# EAGLE board driverMotor (EAGLE 9.6.2)
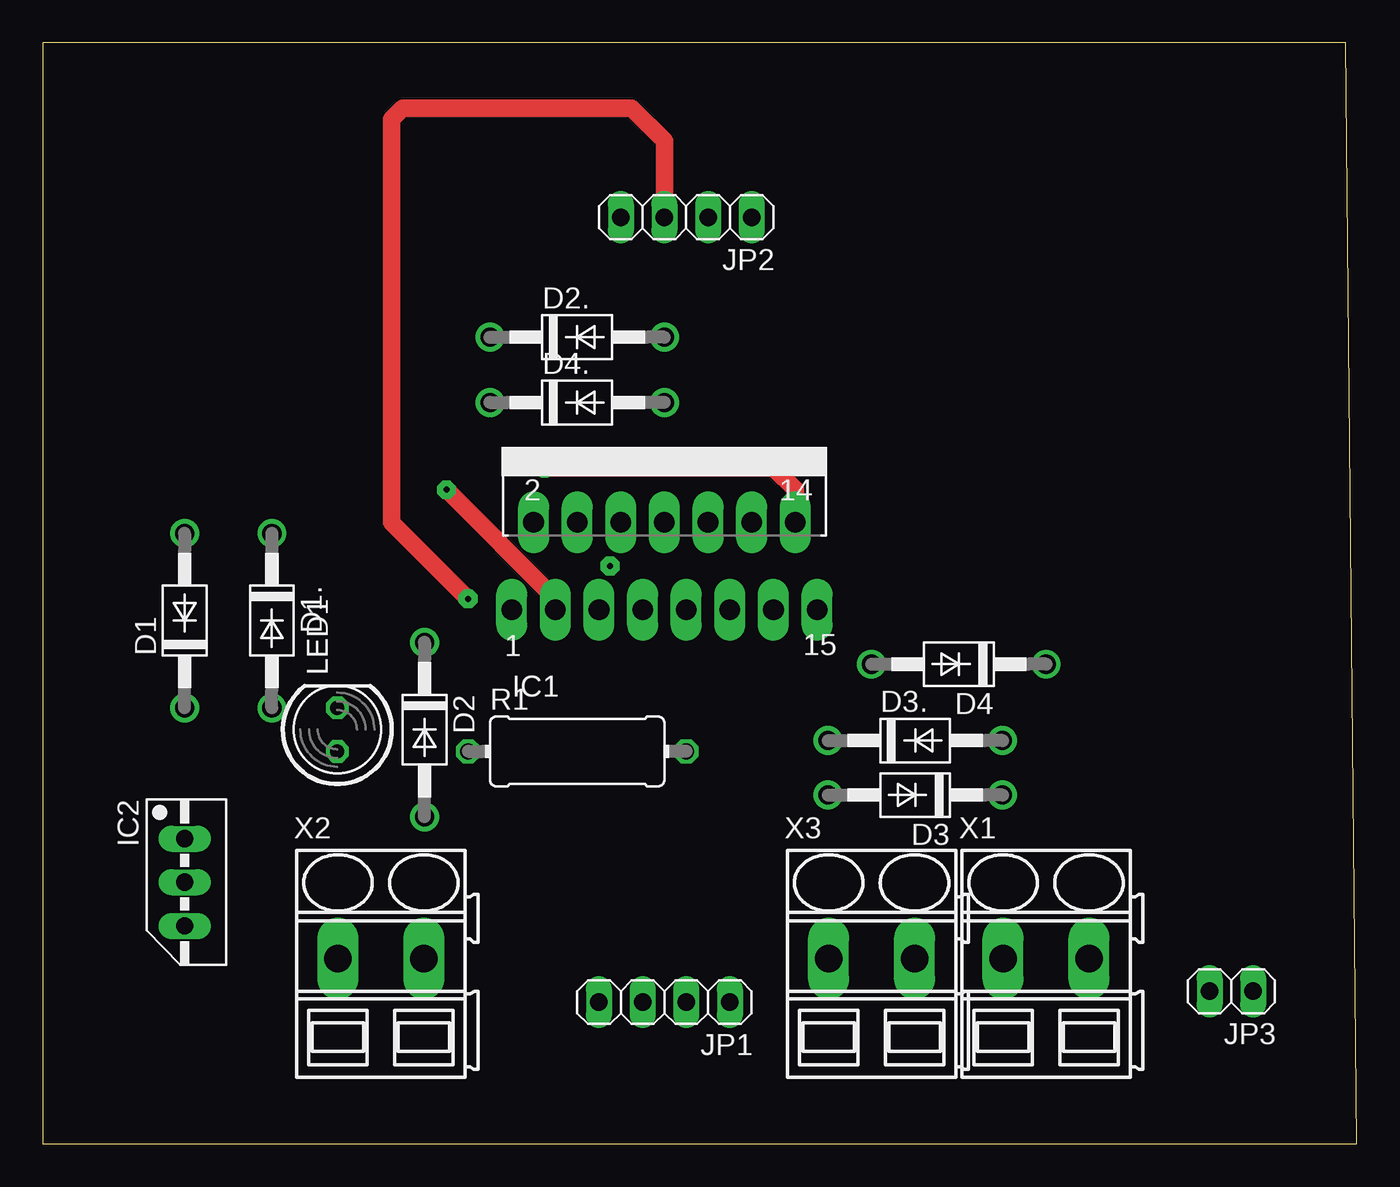
[diagram p0: board, top side]
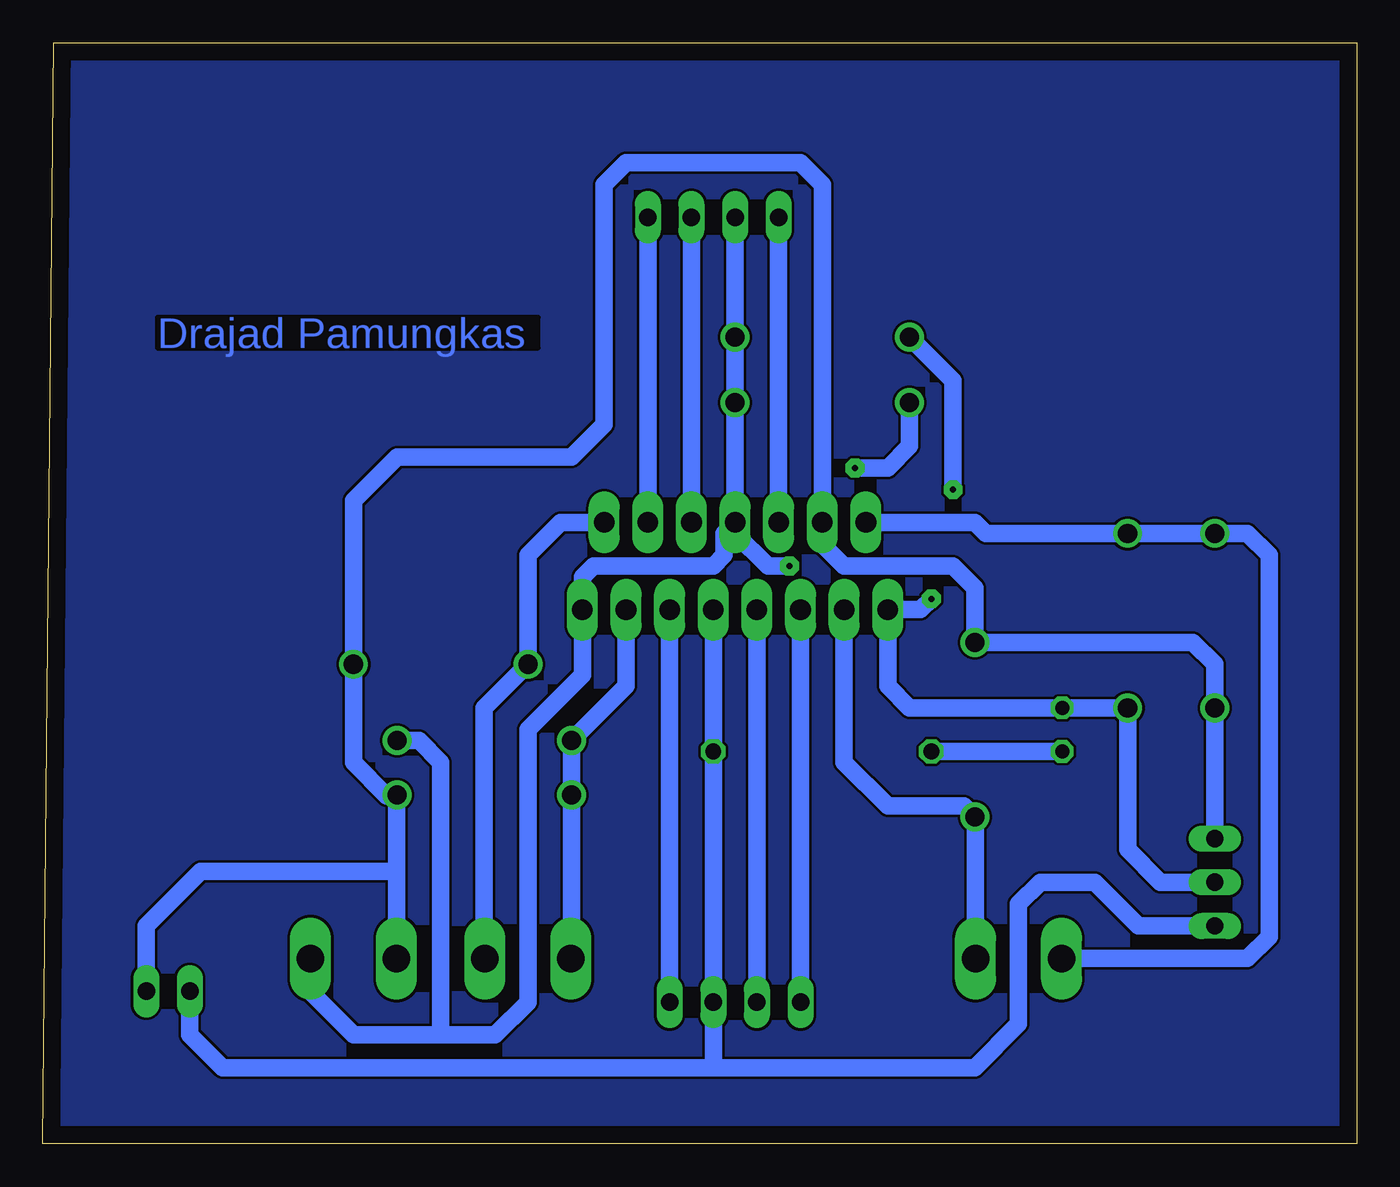
[diagram p1: board, bottom side, seen from below]

Size 76.5 x 64.12 mm. Coordinates in mm from the lower left corner, seen from the top.
Outline: 0,0 76.5,0 75.87,64.12 0,64.12 0,0
Copper layers (1*16): Top 0.035mm / dielectric 1.5mm / Bottom 0.035mm
Design rules "default": minimum track width 6mil, minimum drill 0.35mm, track to track 6mil, track to pad 6mil, pad to pad 6mil, via to via 6mil, smd to smd 6mil, copper to edge 40mil, drill to drill 6mil, minimum pad ring 10mil, minimum via ring 8mil, stop-mask expansion 4mil, vias tented up to drill 0mil, thermal gap 10mil

## Footprints (pad centres in the part's own frame; a part is rotated, then mirrored left to right if it is on the bottom)
DO41-10 = drill 1.118: A 5.08,0; C -5.08,0
MULTIWATT-15 = drill 1.2 long: 1 -8.89,-7.62; 2 -7.62,-2.54; 3 -6.35,-7.62; 4 -5.08,-2.54; 5 -3.81,-7.62; 6 -2.54,-2.54; 7 -1.27,-7.62; 8 0,-2.54; 9 1.27,-7.62; 10 2.54,-2.54; 11 3.81,-7.62; 12 5.08,-2.54; 13 6.35,-7.62; 14 7.62,-2.54; 15 8.89,-7.62
78MXXS = drill 1.016 long: GND 0,-2.54; IN -2.54,-2.54; OUT 2.54,-2.54
1X04 = drill 1.016 long: 1 -3.81,0; 2 -1.27,0; 3 1.27,0; 4 3.81,0
1X02 = drill 1.016 long: 1 -1.27,0; 2 1.27,0
LED5MM = drill 0.813 octagon: A -1.27,0; K 1.27,0
0411/12 = drill 0.914 octagon: 1 -6.35,0; 2 6.35,0
SMKDSP_1,5/2 = drill 1.6 pad 1.8 long: 1 -2.5,0; 2 2.5,0

## Placement (x,y rotation side)
D1  1N4004  [DO41-10]  8.25,30.48 90 top
D1.  1N4004  [DO41-10]  13.34,30.48 270 top
D2  1N4004  [DO41-10]  22.23,24.13 270 top
D2.  1N4004  [DO41-10]  31.12,46.99 0 top
D3  1N4004  [DO41-10]  50.8,20.32 180 top
D3.  1N4004  [DO41-10]  50.8,23.5 0 top
D4  1N4004  [DO41-10]  53.34,27.94 180 top
D4.  1N4004  [DO41-10]  31.12,43.18 0 top
IC1  L298  [MULTIWATT-15]  36.2,38.73 0 top
IC2  [78MXXS]  10.8,15.24 270 top
JP1  [1X04]  36.2,8.25 180 top
JP2  [1X04]  37.47,53.97 180 top
JP3  [1X02]  69.22,8.89 180 top
LED1  [LED5MM]  17.14,24.13 90 top
R1  [0411/12]  31.12,22.86 0 top
X1  SMKDSP_1,5/2  [SMKDSP_1,5/2]  58.42,10.79 0 top
X2  SMKDSP_1,5/2  [SMKDSP_1,5/2]  19.68,10.79 0 top
X3  SMKDSP_1,5/2  [SMKDSP_1,5/2]  48.26,10.79 0 top

## Library data of the parts
D1 D1. D2 D2. D3 D3. D4 D4. = diode
IC1 = st-microelectronics
IC2 = v-reg
JP1-JP3 = pinhead
LED1 = led
R1 = resistor
X1-X3 = con-phoenix-smkdsp; MF: FARNELL; MPN: 1733570; OC_FARNELL: 3041244; OC_NEWARK: 69C8588

## Nets
+5V: IC1.9 IC2.OUT JP1.2 JP3.2 R1.2
ENABLE_A: IC1.6 JP2.4
ENABLE_B: IC1.11 JP1.1
GND: D1..A D2..A D3..A D4..A IC1.1 IC1.8 IC1.15 IC2.GND JP2.3 LED1.K X1.2
INPUT1: IC1.5 JP1.4
INPUT2: IC1.7 JP1.3
INPUT3: IC1.10 JP2.2
INPUT4: IC1.12 JP2.1
LED: LED1.A R1.1
MOTOR1_1: D1..C D1.A IC1.2 X2.1
MOTOR1_2: D2..C D2.A IC1.3 X2.2
MOTOR2_1: D3..C D3.A IC1.13 X3.1
MOTOR2_2: D4..C D4.A IC1.14 X3.2
VS: D1.C D2.C D3.C D4.C IC1.4 IC2.IN JP3.1 X1.1

## Tracks (layer width: path | path; a pad name or v marks a point on that pad's centre or on a via)
+5V
  Bottom 1.016: JP3.2 67.94,6.35 66.04,4.45 37.47,4.45 | IC1.9 R1.2 JP1.2 37.47,4.45 | IC2.OUT 12.7,12.7 15.24,15.24 18.41,15.24 19.68,13.97 19.68,6.98 22.23,4.45 37.47,4.45
ENABLE_A
  Bottom 1.016: JP2.4 IC1.6
ENABLE_B
  Bottom 1.016: IC1.11 JP1.1
GND  (via drill 0.35 pad 1.1)
  Top 1.016: v24.77,31.75 20.32,36.2 20.32,59.69 20.95,60.33 34.29,60.33 36.2,58.42 JP2.3
  Bottom 1.016: X1.2 60.92,8.85 58.42,6.35 53.34,6.35 | 53.34,6.35 50.16,6.35 48.26,8.25 48.26,24.13 45.09,27.3 IC1.15 45.09,33.02 44.45,33.66 37.47,33.66 36.83,34.29 36.83,35.56 IC1.8 | IC2.GND 11.43,15.24 13.34,17.14 D1..A LED1.K 26.04,25.4 27.3,26.67 IC1.1 25.4,31.11 v24.77,31.75 | JP2.3 D2..A D4..A IC1.8 | D3..A 54.61,23.5 53.34,22.23 53.34,6.35 | IC1.8 36.2,35.56 34.29,33.66 v33.02,33.66
GNF
  pour Bottom: 0.63,64.13 76.2,64.13 76.2,0 0,0 0,64.13
INPUT1
  Bottom 1.016: IC1.5 JP1.4
INPUT2
  Bottom 1.016: JP1.3 IC1.7
INPUT3
  Bottom 1.016: JP2.2 IC1.10
INPUT4
  Bottom 1.016: JP2.1 IC1.12
LED
  Bottom 1.016: LED1.A R1.1
MOTOR1_1
  Bottom 1.016: X2.1 6.35,10.79 5.08,12.06 5.08,34.29 6.35,35.56 D1.A D1..C 21.59,35.56 22.23,36.2 IC1.2
MOTOR1_2  (via drill 0.35 pad 1.1)
  Top 1.016: v23.49,38.1 29.84,31.75 IC1.3
  Bottom 1.016: X2.2 22.19,19.01 D2.A 22.86,19.69 27.3,19.69 29.84,22.23 IC1.3 | D2..C 23.49,44.45 v23.49,38.1
MOTOR2_1
  Bottom 1.016: X3.1 45.72,10.83 D3.A D3..C 42.55,26.67 IC1.13
MOTOR2_2  (via drill 0.35 pad 1.1)
  Top 1.016: v29.21,39.37 42.55,39.37 43.81,38.1 IC1.14
  Bottom 1.016: IC1.14 46.35,36.2 48.26,34.29 D4.A 50.8,25.4 50.8,10.83 X3.2 | D4..C 26.04,40.64 27.3,39.37 v29.21,39.37
VS
  Bottom 1.016: D3.C 55.92,20.28 | 55.92,20.28 55.92,15.87 | 55.92,15.87 X1.1 | JP3.1 70.49,12.7 67.31,15.87 55.92,15.87 | IC2.IN D1.C 8.25,27.94 9.52,29.21 D2.C 22.23,32.38 23.49,33.66 29.84,33.66 31.12,34.92 IC1.4 31.12,55.88 32.38,57.15 42.55,57.15 43.81,55.88 43.81,41.91 45.72,40 55.88,40 58.42,37.46 D4.C 58.42,22.23 56.48,20.28 55.92,20.28

## Text on the board
Bottom: Drajad Pamungkas